# EAGLE board clock-digits (EAGLE 7.5.0)
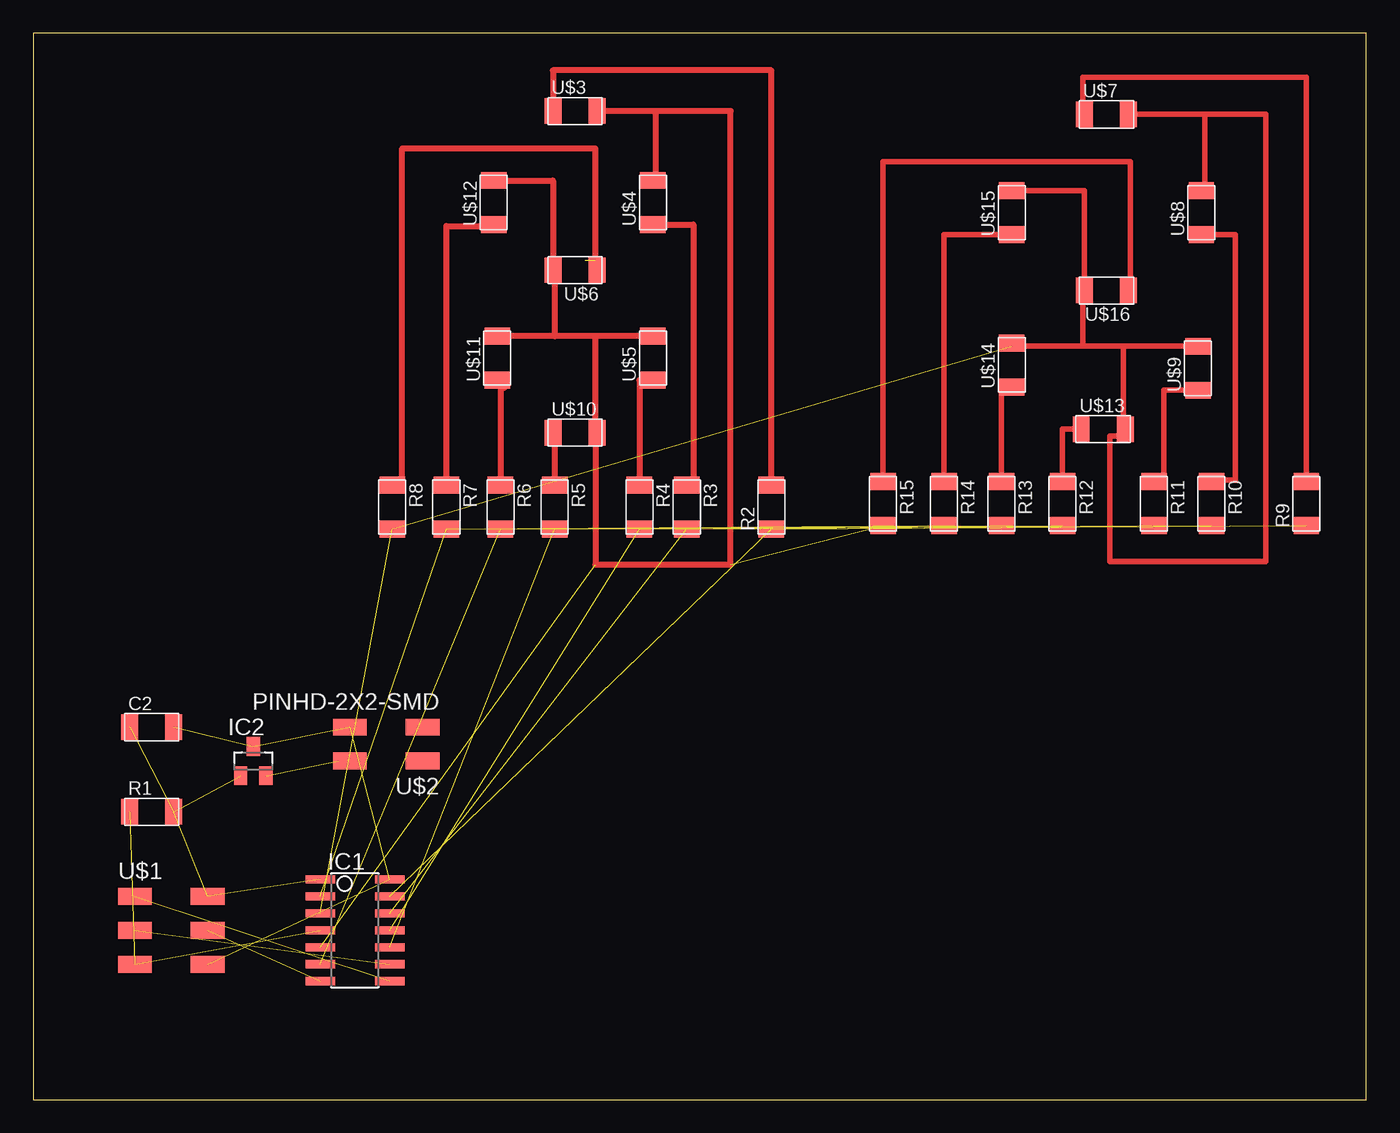
[diagram p0: board, top side]

Size 100 x 80 mm. Coordinates in mm from the lower left corner, seen from the top.
Outline: 0,0 100,0 100,80 0,80 0,0
Copper layers (1*16): Top 0.035mm / dielectric 1.5mm / Bottom 0.035mm
Design rules "fab": minimum track width 0.3mm, minimum drill 32mil, track to track 0.397mm, track to pad 0.397mm, pad to pad 0.397mm, via to via 0.397mm, smd to smd 0.315mm, copper to edge 40mil, drill to drill 16mil, minimum pad ring 10mil, minimum via ring 8mil, stop-mask expansion 4mil, vias tented up to drill 0mil, thermal gap 10mil
Net classes: 0 default: width 0.457 mm, clearance 1.626 mm

## Footprints (pad centres in the part's own frame; a part is rotated, then mirrored left to right if it is on the bottom)
C1206FAB = smd 1.27 x 1.905: 1 -1.651,0; 2 1.651,0
SOIC14 = smd 0.61 x 2.21: 1 -3.81,-2.603; 2 -2.54,-2.603; 3 -1.27,-2.603; 4 0,-2.603; 5 1.27,-2.603; 6 2.54,-2.603; 7 3.81,-2.603; 8 3.81,2.603; 9 2.54,2.603; 10 1.27,2.603; 11 0,2.603; 12 -1.27,2.603; 13 -2.54,2.603; 14 -3.81,2.603
SOT23 = smd 1 x 1.4: 1 -0.95,-1.1; 2 0.95,-1.1; 3 0,1.1
R1206FAB = smd 1.27 x 1.905: 1 -1.651,0; 2 1.651,0
2X03SMD = smd 2.54 x 1.27: 1 -2.54,2.54; 2 2.92,2.54; 3 -2.54,0; 4 2.92,0; 5 -2.54,-2.54; 6 2.92,-2.54
2X02SMD = smd 2.54 x 1.27: 1 -2.54,1.27; 2 2.92,1.27; 3 -2.54,-1.27; 4 2.92,-1.27
LED1206FAB = smd 1.27 x 1.905: 1 -1.651,0; 2 1.651,0

## Placement (x,y rotation side)
C2  1µf  [C1206FAB]  8.89,27.94 0 top
IC1  ATTINY44-SSU  [SOIC14]  24.13,12.7 270 top
IC2  5V  [SOT23]  16.51,25.4 0 top
R1  10k  [R1206FAB]  8.89,21.59 0 top
R2  [R1206FAB]  55.37,44.45 90 top
R3  [R1206FAB]  49.02,44.45 270 top
R4  [R1206FAB]  45.47,44.45 270 top
R5  [R1206FAB]  39.12,44.45 270 top
R6  [R1206FAB]  35.05,44.45 270 top
R7  [R1206FAB]  30.99,44.45 270 top
R8  [R1206FAB]  26.92,44.45 270 top
R9  [R1206FAB]  95.5,44.7 90 top
R10  [R1206FAB]  88.39,44.7 270 top
R11  [R1206FAB]  84.07,44.7 270 top
R12  [R1206FAB]  77.22,44.7 270 top
R13  [R1206FAB]  72.64,44.7 270 top
R14  [R1206FAB]  68.33,44.7 270 top
R15  [R1206FAB]  63.75,44.7 270 top
U$1  AVRISPSMD  [2X03SMD]  10.16,12.7 0 top
U$2  PINHD-2X2-SMD  [2X02SMD]  26.67,26.67 180 top
U$3  LEDFAB1206  [LED1206FAB]  40.64,74.17 0 top
U$4  LEDFAB1206  [LED1206FAB]  46.48,67.31 90 top
U$5  LEDFAB1206  [LED1206FAB]  46.48,55.63 90 top
U$6  LEDFAB1206  [LED1206FAB]  40.64,62.23 180 top
U$7  LEDFAB1206  [LED1206FAB]  80.52,73.91 0 top
U$8  LEDFAB1206  [LED1206FAB]  87.63,66.55 90 top
U$9  LEDFAB1206  [LED1206FAB]  87.38,54.86 90 top
U$10  LEDFAB1206  [LED1206FAB]  40.64,50.04 0 top
U$11  LEDFAB1206  [LED1206FAB]  34.8,55.63 90 top
U$12  LEDFAB1206  [LED1206FAB]  34.54,67.31 90 top
U$13  LEDFAB1206  [LED1206FAB]  80.26,50.29 0 top
U$14  LEDFAB1206  [LED1206FAB]  73.41,55.12 90 top
U$15  LEDFAB1206  [LED1206FAB]  73.41,66.55 90 top
U$16  LEDFAB1206  [LED1206FAB]  80.52,60.71 180 top

## Library data of the parts
C2 IC1 IC2 R1-R15 U$1-U$16 = fab

## Nets
GND: C2.2 IC1.14 IC2.3 U$1.6 U$2.4
MISO: IC1.8 U$1.1
MOSI: IC1.7 U$1.4
N$1: IC1.13 R2.1 R9.1
N$2: R2.2 U$3.1
N$3: IC1.12 R3.2 R10.2
N$4: R3.1 U$4.1
N$5: IC1.11 R4.2 R11.2
N$6: R4.1 U$5.1
N$7: IC1.10 R5.2 R12.2
N$8: R5.1 U$10.1
N$9: IC1.6 R6.2 R13.2
N$10: R6.1 U$11.1
N$11: IC1.2 R7.2 R14.2
N$12: R7.1 U$12.1
N$14: R8.1 U$6.1
N$15: IC1.5 R15.2 U$3.2 U$4.2 U$5.2 U$6.2 U$10.2 U$11.2 U$12.2
N$16: R9.2 U$7.1
N$17: R15.1 U$16.1
N$18: R10.1 U$8.1
N$20: R11.1 U$9.1
N$21: R12.1 U$13.1
N$23: R13.1 U$14.1
N$24: R14.1 U$15.1
N$28: IC1.3 R8.2 U$7.2 U$8.2 U$9.2 U$13.2 U$14.2 U$15.2 U$16.2
RST: IC1.4 R1.1 U$1.5
SCK: IC1.9 U$1.3
VCC: C2.1 IC1.1 IC2.1 R1.2 U$1.2
VIN: IC2.2 U$2.2

## Tracks (layer width: path | path; a pad name or v marks a point on that pad's centre or on a via)
GND  (4 unrouted)
MISO  (1 unrouted)
MOSI  (1 unrouted)
N$1  (2 unrouted)
N$2
  Top 0.457: R2.2 55.37,77.22 38.99,77.22 U$3.1
N$3  (2 unrouted)
N$4
  Top 0.457: U$4.1 49.53,65.66 49.53,46.48 49.02,46.48 R3.1
N$5  (2 unrouted)
N$6
  Top 0.457: U$5.1 45.47,53.98 R4.1
  Top 0.61: R4.1 45.72,46.23
N$7  (2 unrouted)
N$8
  Top 0.457: U$10.1 39.12,50.04 R5.1
  Top 0.61: 39.5,46.1 R5.1 39.88,46.23 39.37,46.23
N$9  (2 unrouted)
N$10
  Top 0.457: 35.31,53.47 35.05,53.47 R6.1
  Top 0.61: U$11.1 35.31,53.47
N$11  (2 unrouted)
N$12
  Top 0.457: R7.1 30.99,65.53 34.8,65.53 U$12.1
N$14  (1 unrouted)
  Top 0.457: R8.1 27.69,46.1 27.69,71.37 42.16,71.37 42.16,62.99 42.29,62.99 U$6.1
N$15  (2 unrouted)
  Top 0.457: U$12.2 38.99,68.96 U$6.2 39.12,62.23 39.12,57.28 | U$5.2 42.16,57.28 | 42.16,57.28 39.12,57.28 | 39.12,57.28 U$11.2 | U$10.2 42.16,50.04 | 42.16,50.04 42.16,57.28 | 42.16,50.04 42.16,40.13 52.32,40.13 52.32,74.17 46.74,74.17 | 46.74,74.17 U$3.2 | U$4.2 46.74,68.96 46.74,74.17
N$16
  Top 0.406: U$7.1 78.74,73.91 78.74,76.71 95.5,76.71 R9.2
N$17
  Top 0.406: R15.1 63.75,70.36 82.3,70.36 82.3,60.71 U$16.1
N$18
  Top 0.406: U$8.1 90.17,64.9 90.17,46.48 88.39,46.48 R10.1
N$20
  Top 0.406: U$9.1 84.84,53.21 84.84,46.48 84.07,46.48 R11.1
N$21
  Top 0.406: U$13.1 77.22,50.29 R12.1
N$23
  Top 0.406: U$14.1 72.64,53.47 R13.1
N$24
  Top 0.406: U$15.1 68.33,64.9 R14.1
N$28  (2 unrouted)
  Top 0.406: U$7.2 87.88,73.91 | 87.88,73.91 92.46,73.91 92.46,40.39 80.77,40.39 80.77,49.78 81.92,49.78 U$13.2 81.79,50.29 81.79,56.52 | U$8.2 87.88,68.2 87.88,73.91 | U$9.2 81.79,56.52 | 81.79,56.52 78.74,56.52 | 78.74,56.52 73.41,56.52 U$14.2 | 78.74,56.52 78.74,60.71 U$16.2 78.87,68.2 U$15.2
RST  (2 unrouted)
SCK  (1 unrouted)
VCC  (4 unrouted)
VIN  (1 unrouted)
  Top 0.406: U$2.2 22.86,25.4 | 17.46,24.13 IC2.2